# Altium PCB Pocket_Organ_V17_2021-03-17.pcbdoc (part 2 of 2)
Units mil, origin at the board's own origin, x right, y up, seen from the top; angles counter-clockwise.
Board outline 7067.95 x 4900.94 mil, 2 copper layers (Top Layer, Bottom Layer); 193 components, 249 nets, 797 pads, 188 vias.
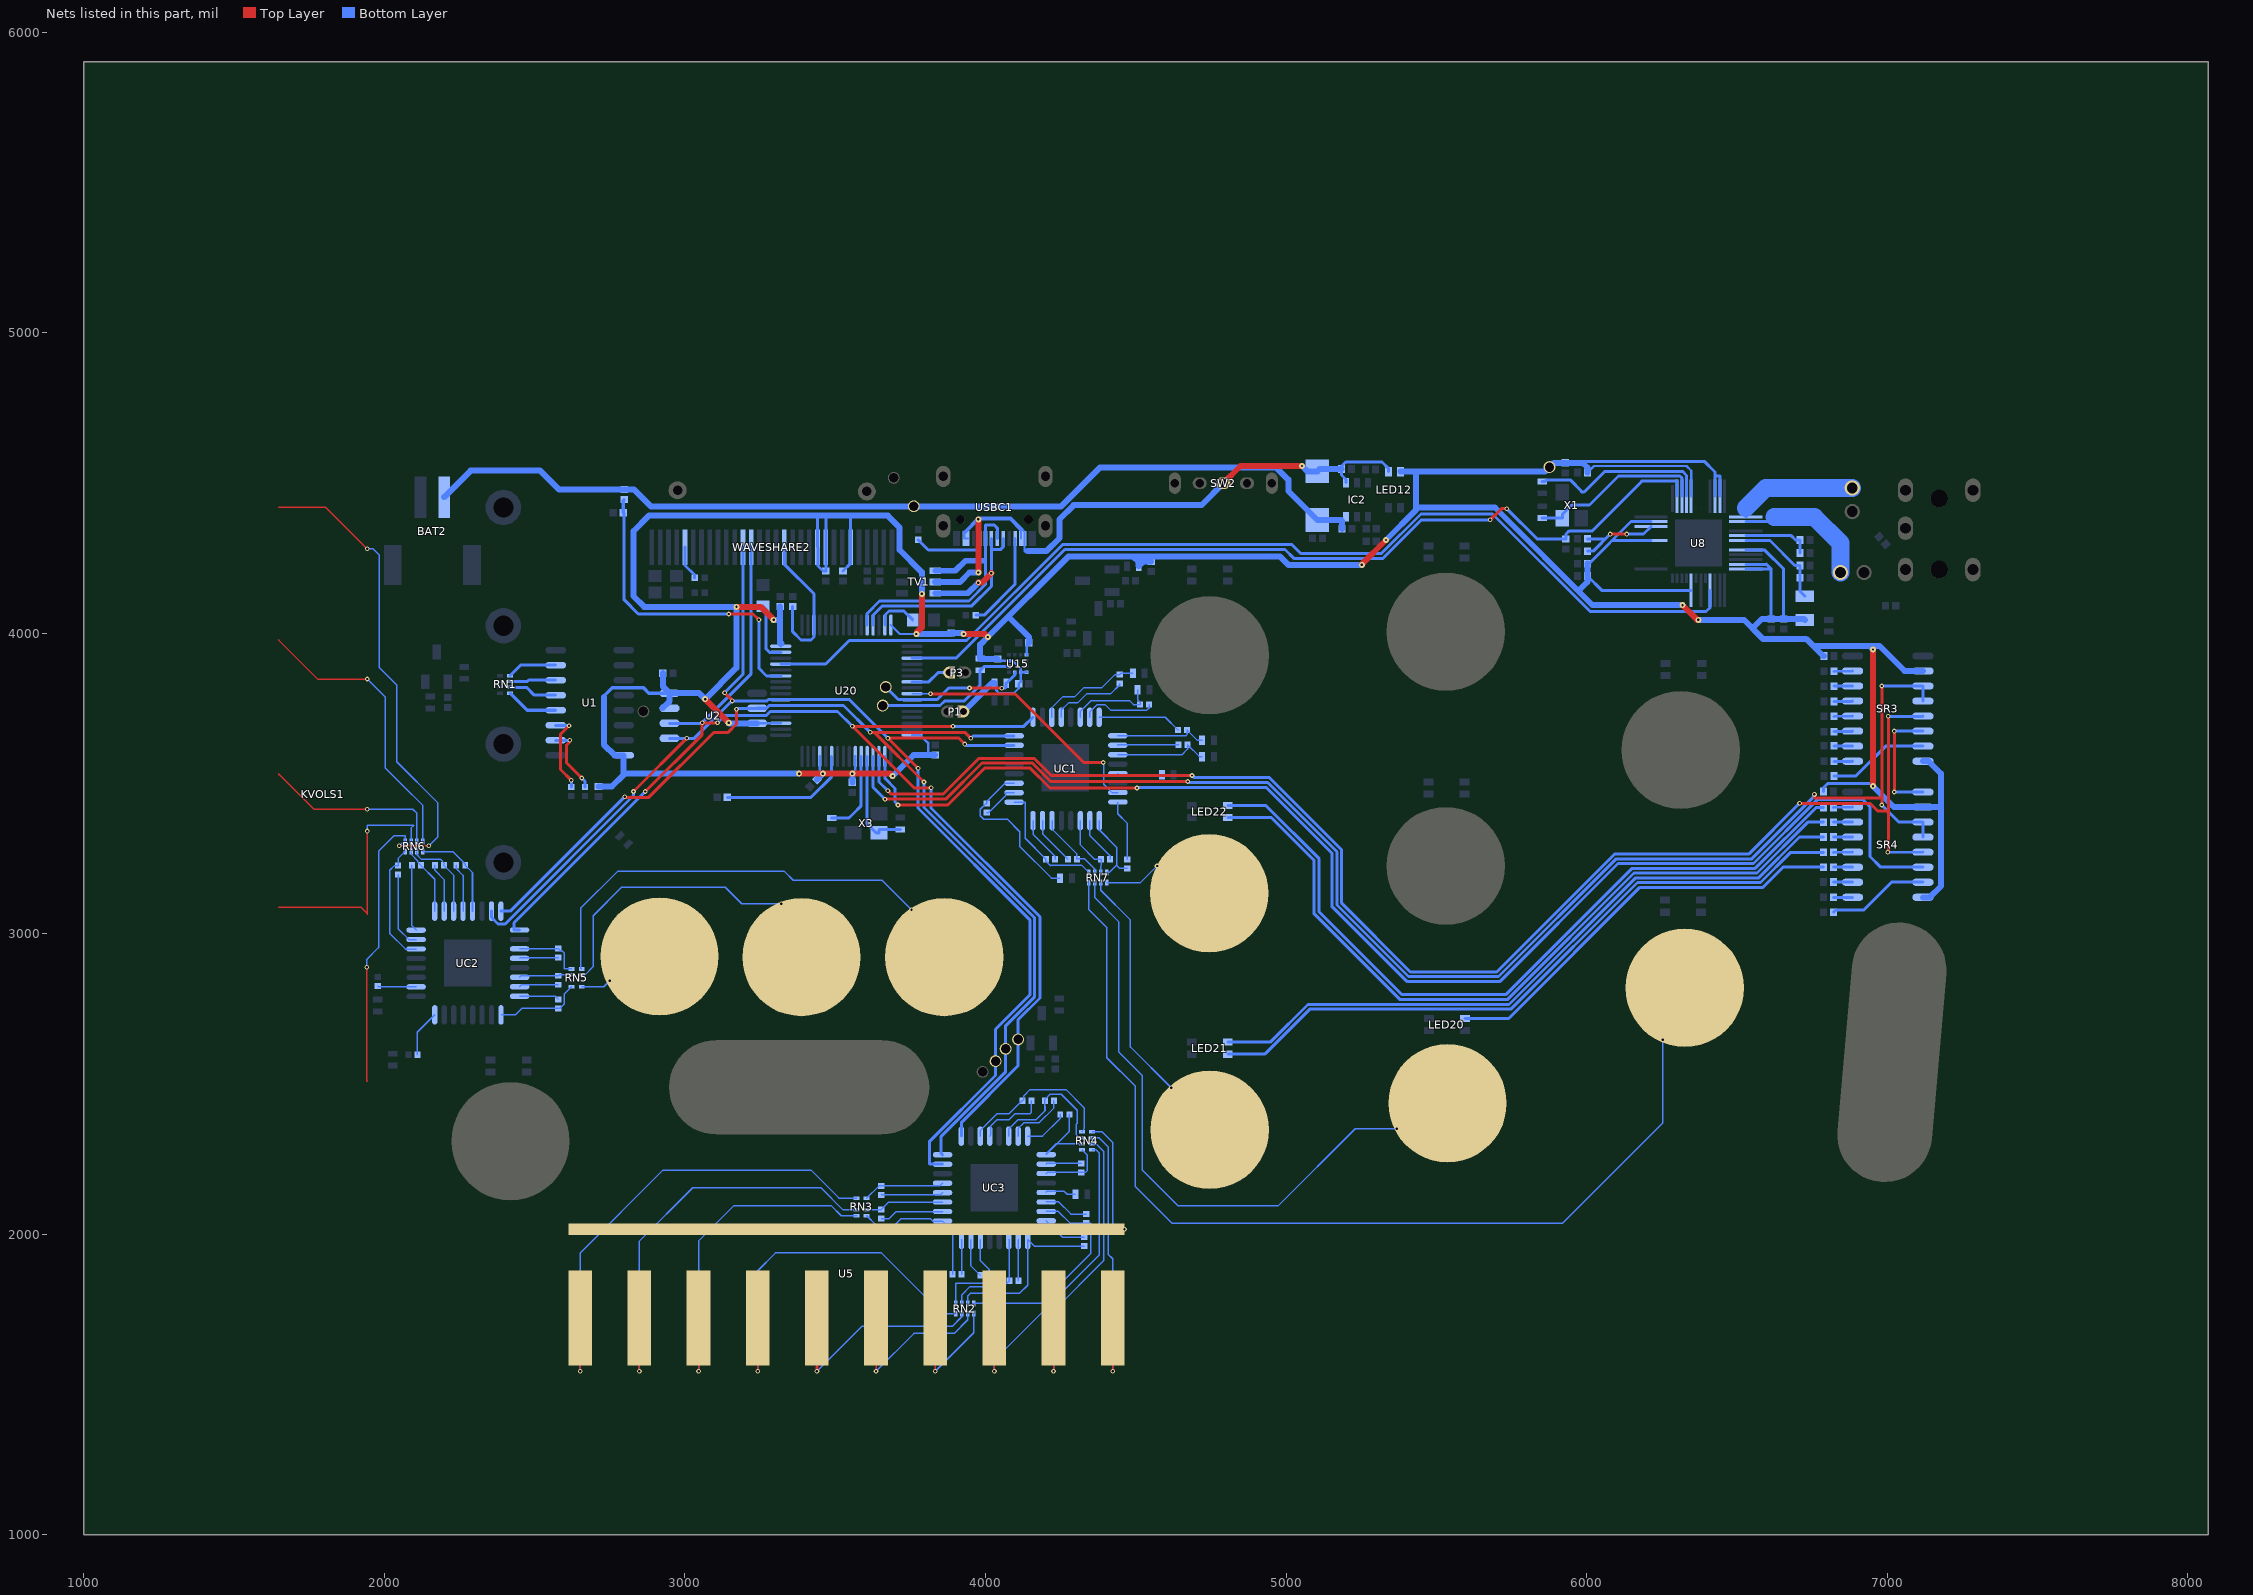
[diagram p2: the nets of this part, all layers, seen from the top]

## Via types
v1: diameter 15.75, hole 7.87, Top Layer to Bottom Layer, 148 vias
v2: diameter 20, hole 7.87, Top Layer to Bottom Layer, 40 vias

## Nets (pads, with @x,y where several pads share a name; then routed paths per layer and width w, separated by ;. In a path a pad name is that pad's centre, name@x,y a point inside that pad or via, vN(x,y) a via of type N, cw(c..) or ccw(c..) an arc to the next point about the centre after c; other vN are vias at no path point) (continued)
R82_1: LED20.2 R82.1 | length 1401.7
  Bottom Layer w10: LED20.2@5595.43,2717.91 5740.52,2717.88 6177.12,3154.58 6586.62,3154.58 6653.52,3221.58 R82.1@6788.42,3221.58
R83_1: LED21.4 R83.1 | length 2260.6
  Bottom Layer w10: LED21.4@4806.02,2599.18 4928.82,2599.18 5078.72,2749.08 5748.02,2749.08 6169.32,3170.38 6578.72,3170.38 6679.12,3270.78 R83.1@6788.41,3270.75
R84_1: LED21.2 R84.1 | length 2265.3
  Bottom Layer w10: LED21.2@4806.02,2639.18 4947.22,2639.18 5072.82,2764.88 5742.12,2764.88 6163.42,3186.08 6572.82,3186.08 6708.62,3321.98 R84.1@6788.42,3321.98
R85_1: LED22.4 R85.1 | length 2581.8
  Bottom Layer w10: LED22.4@4806.02,3386.58 4951.12,3386.58 5092.52,3245.18 5092.52,3067.98 5379.92,2780.58 5736.22,2780.58 6157.52,3201.88 6566.92,3201.88 6736.22,3371.18 R85.1@6788.42,3371.18
R86_1: LED22.2 R86.1 | length 2604.1
  Bottom Layer w10: LED22.2@4806.02,3426.58 4932.72,3426.58 5110.22,3249.08 5110.22,3071.98 5383.82,2798.28 5732.32,2798.28 6151.62,3217.58 6561.02,3217.58 6763.82,3420.38 R86.1@6788.41,3420.36
RN2_1: RN2.1 U5.4 | length 1279.3
  Top Layer w5: v1(3242.13,1544.37) U5.4@3242.12,1721.54
  Bottom Layer w5: v1(3242.13,1544.37) 3242.13,1879.02 3301.18,1938.07 3653.54,1938.07 3855.41,1736.21 RN2.1@3901.57,1736.2
RN2_2: RN2.2 U5.5 | length 745.2
  Top Layer w10: v1(3438.98,1544.37) U5.5@3438.97,1721.54
  Bottom Layer w5: v1(3438.98,1544.37) 3588.62,1693.98 3889.76,1693.98 3921.26,1725.48 RN2.2@3921.25,1736.2
RN2_3: RN2.3 U5.6 | length 573.8
  Top Layer w5: v1(3635.83,1544.37) U5.6@3635.82,1721.54
  Bottom Layer w5: v1(3635.83,1544.37) 3761.82,1670.36 3895.66,1670.36 3940.94,1715.63 RN2.3@3940.94,1736.2
RN2_4: RN2.4 U5.7 | length 422
  Top Layer w5: v1(3832.68,1544.37) U5.7@3832.67,1721.54
  Bottom Layer w5: v1(3832.68,1544.37) 3960.63,1672.33 RN2.4@3960.62,1736.2
RN3_1: RN3.1 U5.1 | length 1643.2
  Top Layer w5: v1(2651.57,1544.37) U5.1@2651.57,1721.54
  Bottom Layer w5: v1(2651.57,1544.37) 2651.62,1938.18 2927.11,2213.68 3419.28,2213.68 3512.45,2120.51 RN3.1@3571.12,2120.51
RN3_3: RN3.3 U5.2 | length 1436.8
  Top Layer w5: v1(2848.42,1544.37) U5.2@2848.42,1721.54
  Bottom Layer w5: v1(2848.42,1544.37) 2848.42,1977.43 3025.59,2154.61 3452.76,2154.61 3526.22,2081.14 RN3.3@3571.12,2081.14
RN3_4: RN3.4 U5.3 | length 1199.1
  Top Layer w5: v1(3045.28,1544.37) U5.3@3045.27,1721.54
  Bottom Layer w5: v1(3045.28,1544.37) 3045.28,1977.44 3163.38,2095.55 3486.22,2095.55 3520.31,2061.46 RN3.4@3571.12,2061.46
RN4_1: RN4.1 U5.8 | length 1075.6
  Top Layer w5: v1(4029.53,1544.37) U5.8@4029.52,1721.54
  Bottom Layer w5: v1(4029.53,1544.37) 4029.52,1581.78 4377.92,1930.18 4377.92,2270.98 4367.52,2281.48 RN4.1@4354.78,2281.45
RN4_2: RN4.2 U5.9 | length 1027
  Top Layer w5: v1(4226.38,1544.37) U5.9@4226.37,1721.54
  Bottom Layer w5: v1(4226.38,1544.37) 4226.42,1745.18 4393.72,1912.48 4393.72,2275.28 4367.82,2301.18 RN4.2@4354.82,2301.18
RN4_3: RN4.3 U5.10 | length 995.6
  Top Layer w5: v1(4423.23,1544.37) U5.10@4423.22,1721.54
  Bottom Layer w5: RN4.3@4354.78,2320.83 4378.11,2320.82 4407.95,2290.98 4407.95,1933.65 4423.22,1918.38 v1(4423.23,1544.37)
RN4_4: RN4.4 U5.11 | length 1336.3
  Top Layer w5: U5.11@3537.4,2016.81 v1(4462.6,2016.81)
  Bottom Layer w5: RN4.4@4354.78,2340.51 4388.42,2340.48 4423.22,2305.68 4423.22,2016.78 v1(4462.6,2016.81)
RN5_5: K3RD.1 RN5.5 | length 300.4
  Top Layer w10: v1(2750,2843.58) 2834.65,2843.58 K3RD.1@2915.35,2924.29
  Bottom Layer w5: RN5.5@2656.59,2823.69 2730.1,2823.69 v1(2750,2843.58)
RN5_7: K5TH.1 RN5.7 | length 1111.7
  Top Layer w10: v1(3320.87,3099.49) 3387.79,3032.56 K5TH.1@3387.79,2922.32
  Bottom Layer w5: RN5.7@2656.62,2863.08 2667.32,2863.08 2694.92,2890.58 2694.92,3060.08 2789.22,3154.38 3134.12,3154.38 3189.02,3099.48 v1@3320.82,3099.48
RN5_8: K7TH.1 RN5.8 | length 1612
  Top Layer w10: v1(3753.94,3079.8) 3862.2,2971.54 K7TH.1@3862.2,2922.32
  Bottom Layer w5: RN5.8@2656.62,2882.78 2653.52,2882.78 2653.52,3085.38 2775.72,3207.58 3330.92,3207.58 3360.32,3178.18 3655.52,3178.18 v1(3753.94,3079.8)
RN6_1: KVOLS1.4 RN6.1 | length 966
  Top Layer w5: KVOLS1.4@1647.64,3977.46 1777.58,3847.52 v1(1942.91,3847.52)
  Bottom Layer w5: v1(1942.91,3847.52) 2001.96,3788.47 2001.96,3552.24 2061.02,3493.19 2127.95,3426.26 RN6.1@2127.95,3307.31
RN6_2: KVOLS1.3 RN6.2 | length 612.6
  Top Layer w5: KVOLS1.3@1647.64,3528.64 1647.63,3532.56 1765.74,3414.45 v1(1942.91,3414.45)
  Bottom Layer w5: v1(1942.91,3414.45) 2094.48,3414.45 2108.27,3400.67 RN6.2@2108.26,3307.31
RN6_3: KVOLS1.2 RN6.3 | length 813.1
  Top Layer w5: KVOLS1.2@1647.64,3087.7 1922.87,3087.7 1942.91,3067.66 ; 1942.92,3064.06 v1(1942.92,3341.61)
  Bottom Layer w5: v1(1942.92,3341.61) 1942.92,3360.98 2097.95,3360.98 2088.58,3351.61 RN6.3@2088.57,3307.31
RN6_4: KVOLS1.1 RN6.4 | length 2497.5
  Top Layer w5: KVOLS1.1@1647.64,4418.41 1805.09,4418.41 v1(1942.91,4280.59) ; v1(1940.95,2888.86) 1940.95,2510.93 KVOLS1.1@1942.92,2508.96 ; v1(2049.21,3292.4) v1(2147.64,3292.4)
  Bottom Layer w5: v1(1940.95,2888.86) 1940.92,2914.48 1980.32,2953.78 1980.32,3274.68 2031.52,3325.88 2068.92,3325.88 RN6.4@2068.89,3307.31 ; v1(1942.91,4280.59) 1962.62,4280.58 1982.32,4260.88 1982.32,3886.88 2041.32,3827.88 2041.32,3571.98 2177.92,3435.28 2177.92,3322.68 v1(2147.64,3292.4) ; v1(2049.21,3292.4) 2064.07,3307.26 RN6.4@2068.89,3307.31
RN7_1: KLA1.1 RN7.1 | length 3499.5
  Top Layer w5: v1(6253.94,2646.73) 6326.72,2719.52 KLA1.1@6326.72,2819.98
  Bottom Layer w5: RN7.1@4344.19,3170.25 4344.17,3080.13 4403.52,3020.78 4403.52,2587.68 4497.91,2493.28 4497.91,2158.68 4620.12,2036.48 5919.32,2036.48 6253.91,2371.18 v1@6253.91,2646.78
RN7_2: KUT1.1 RN7.2 | length 2227.7
  Top Layer w5: v1(5368.11,2351.46) 5452.73,2436.08 KUT1.1@5537.42,2436.08
  Bottom Layer w5: RN7.2@4363.87,3170.25 4363.86,3119.49 4442.91,3040.43 4442.91,2607.36 4521.65,2528.62 4521.65,2213.66 4620.07,2115.24 4639.76,2095.55 4974.4,2095.55 5230.31,2351.46 v1(5368.11,2351.46)
RN7_3: KSI1.1 RN7.3 | length 973
  Top Layer w5: v1(4618.11,2487.29) 4618.11,2475.39 KSI1.1@4746.02,2347.48
  Bottom Layer w5: RN7.3@4383.52,3170.28 4383.52,3144.88 4482.32,3046.08 4482.32,2623.08 v1(4618.11,2487.29)
RN7_4: KFA1.1 RN7.4 | length 401.3
  Top Layer w5: v1(4570.87,3225.47) 4653.52,3225.47 KFA1.1@4744.12,3134.88
  Bottom Layer w5: RN7.4@4403.24,3170.25 4515.62,3170.24 v1(4570.87,3225.47)
RST_MIDI: R13.2 U8.38 U20.51 | length 2960.4
  Top Layer w10: v1(5679.13,4377.05) 5716.53,4414.45 v1(5734.25,4414.45)
  Bottom Layer w10: U20.51@3755.72,3916.86 3902.02,3916.88 4263.82,4278.58 4996.12,4278.58 5025.62,4249.08 5322.82,4249.08 5450.82,4377.08 v1@5679.12,4377.08 ; v1@5734.22,4414.48 5835.62,4313.08 R13.2@5931.12,4313.08 ; R13.2@5931.09,4313.04 5931.1,4329.81 5940.94,4339.64 6017.71,4339.64 6183.02,4504.95 6183.02,4506.98 6301.02,4506.98 U8.38@6301.04,4455.78
RST_OLED: R12.1 U20.35 WAVESHARE2.14 | length 509.8
  Bottom Layer w10: WAVESHARE2.14@3330.71,4286.49 3330.72,4229.38 3428.96,4131.14 U20.35@3428.96,4027.08 ; R12.1@3358.26,4088.69 3358.32,4004.98 3385.82,3977.48 3419.32,3977.48 3429.12,3987.28 U20.35@3428.95,4027.09
S$51: 
S$67: 
S$69: 
S$76: 
S$78: 
S$82: 
S$84: 
S$86: 
S$89: 
S$2850: 
S$2853: 
S$18198: 
S$18200: 
S$18205: 
S$18209: 
S$18211: 
S$133904: 
S$141146: 
S$146126: 
S$148393: 
S$148395: 
S$148397: 
S$148399: 
S$148401: 
S$148403: 
S$148405: 
S$148407: 
S$148409: 
S$148411: 
S$148413: 
S$148415: 
S$148417: 
S$148421: 
S$148423: 
S$148425: 
S$148427: 
S$148429: 
S$148431: 
S$148433: 
S$148435: 
S$148437: 
S$148441: 
S$148445: 
S$148447: 
S$148723: 
S$148969: 
S$148971: 
S$148973: 
SCL: pad.24 R38.1 U15.12 U20.58 | length 497.2
  Top Layer w10: v1(3946.84,3817.78) 4053.17,3817.78 v1(4053.79,3817.16)
  Bottom Layer w10: pad.24@3667.95,3820.98 3709.88,3779.05 U20.58@3755.73,3779.05 ; U20.58@3755.72,3779.05 3839.02,3779.08 3877.72,3817.78 v1(3946.84,3817.78) ; v1(4053.79,3817.16) 4064.74,3817.16 4068.9,3821.32 R38.1@4068.89,3833.53 4070.16,3833.53 4097.66,3861.03 U15.12@4097.65,3869.53
SDA: pad.25 R39.1 U15.2 U20.59 | length 502.6
  Bottom Layer w10: pad.25@3657.95,3759.37 U20.59@3755.72,3759.38 ; U20.59@3755.72,3759.38 3848.82,3759.38 3864.22,3774.68 3929.33,3774.68 3982.28,3827.62 R39.1@3982.28,3876.83 3994.67,3889.23 U15.2@4077.97,3889.22
SPI_MISO: pad.21 U2.2 U20.22 UC1.16 UC2.16 UC3.16 | length 3841.1
  Top Layer w10: v1(2799.22,3455.79) 2801.19,3453.82 2879.92,3453.82 3096.45,3670.35 3143.7,3670.35 3171.26,3697.92 v1(3171.26,3747.13) ; v1(3795.28,3505) 3629.93,3670.35 3616.14,3670.35 3931.1,3670.35 v1(3950.79,3650.67)
  Bottom Layer w10: UC2.16@2387.55,3075.14 2418.56,3075.14 v1(2799.22,3455.79) ; v1(3171.26,3747.13) 3174.39,3750.26 U2.2@3240.15,3750.26 ; U2.2@3240.12,3750.28 3271.02,3750.28 3280.12,3759.38 U20.22@3318.72,3759.38 3527.11,3759.38 v1(3616.14,3670.35) ; v1(3795.28,3505) 3795.32,3420.38 4163.42,3052.28 4163.42,2790.48 4066.92,2693.98 pad.21@4066.92,2616.92 4066.92,2540.48 3852.32,2325.88 3852.32,2269.28 UC3.16@3857.02,2264.61 ; v1(3950.79,3650.67) 3958.41,3658.3 UC1.16@4095.21,3658.31
SPI_MOSI: pad.22 U2.5 U20.23 UC1.15 UC2.15 UC3.15 WAVESHARE2.19 | length 4549.9
  Top Layer w10: v1(2828.74,3473.5) v1(3005.91,3650.67) ; v1(3131.89,3802.24) 3157.48,3776.65 v1(3157.48,3774.68) ; v1(3775.59,3550.28) v1(3675.2,3650.67) 3911.41,3650.67 v1(3931.1,3630.98)
  Bottom Layer w10: UC2.15@2356.12,3075.18 2356.12,3054.48 2377.92,3032.58 2401.62,3032.58 2828.74,3459.7 v1(2828.74,3473.5) ; U2.5@2948.81,3650.26 3031.1,3650.26 3155.52,3774.68 3272.33,3774.68 3277.33,3779.08 U20.23@3318.72,3779.05 ; v1(3131.89,3802.24) 3192.91,3863.27 WAVESHARE2.19@3192.91,4286.49 ; U20.23@3318.72,3779.05 3546.82,3779.05 v1(3675.2,3650.67) ; v1(3775.59,3550.28) 3775.62,3418.38 4147.62,3046.38 4147.62,2796.38 4033.42,2682.18 pad.22@4033.42,2576.2 4033.42,2528.58 3813.02,2308.18 3813.02,2233.08 UC3.15@3857.02,2233.11 ; v1(3931.1,3630.98) 3935.28,3626.8 UC1.15@4095.21,3626.81
SPI_SCLK: pad.20 U2.6 U20.21 UC1.17 UC2.17 UC3.17 WAVESHARE2.18 | length 4641.2
  Top Layer w10: v1(2868.11,3473.5) 3057.09,3662.49 v1(3057.09,3701.85) v1(3108.27,3701.85) ; v1(3818.9,3485.32) 3761.8,3485.32 v1(3557.09,3690.04) v1(3891.73,3690.04)
  Bottom Layer w10: UC2.17@2449.52,3012.58 2431.12,3012.58 2431.12,3036.48 v1(2868.11,3473.5) ; U2.6@2948.81,3700.26 3055.49,3700.26 v1(3057.09,3701.85) 3220.52,3865.28 WAVESHARE2.18@3220.47,4286.49 ; v1@3108.32,3701.88 3131.92,3725.48 3269.92,3725.48 3284.12,3739.68 U20.21@3318.72,3739.68 3507.44,3739.68 v1(3557.09,3690.04) ; v1(3818.9,3485.32) 3818.9,3418.49 4181.12,3056.26 4181.12,2786.48 4108.22,2713.68 pad.20@4108.22,2648.35 4108.22,2560.38 3919.61,2371.18 UC3.17@3919.62,2326.61 ; v1(3891.73,3690.04) 4127.56,3690.04 UC1.17@4157.81,3720.31
SR3_1: R65.2 SR3.1 | length 61.3
  Bottom Layer w10: R65.2@6823.78,3573.9 6884.77,3573.9 SR3.1@6884.96,3574.09
SR3_2: R66.2 SR3.2 | length 61.1
  Bottom Layer w10: R66.2@6823.78,3625.08 SR3.2@6884.92,3624.08
SR3_3: R69.2 SR3.3 | length 61.9
  Bottom Layer w10: R69.2@6823.78,3672.32 6883.19,3672.33 SR3.3@6884.96,3674.09
SR3_4: R72.2 SR3.4 | length 61.1
  Bottom Layer w10: R72.2@6823.78,3723.5 SR3.4@6884.92,3724.08
SR3_5: R73.2 SR3.5 | length 61.8
  Bottom Layer w10: R73.2@6823.78,3772.72 6883.57,3772.71 SR3.5@6884.96,3774.09
SR3_6: R76.2 SR3.6 | length 61.3
  Bottom Layer w10: R76.2@6823.78,3823.9 6884.76,3823.89 SR3.6@6884.96,3824.09
SR3_7: R78.2 SR3.7 | length 61.1
  Bottom Layer w10: R78.2@6823.78,3873.11 SR3.7@6884.92,3874.08
SR3_14: SR3.14 SR4.9 | length 393.6
  Top Layer w10: v1(7023.62,3471.54) v1(7023.62,3674.29)
  Bottom Layer w10: v1(7023.62,3471.54) 7118.77,3471.54 SR4.9@7118.96,3471.34 ; v1(7023.62,3674.29) 7118.77,3674.29 SR3.14@7118.96,3674.09
SR3_15: R64.2 SR3.15 | length 336.4
  Bottom Layer w10: R64.2@6823.78,3524.68 6895.66,3524.68 6995.07,3624.09 SR3.15@7118.96,3624.09
SR4_1: R80.2 SR4.1 | length 63.2
  Bottom Layer w10: R80.2@6821.81,3121.14 SR4.1@6884.96,3121.34
SR4_2: R81.2 SR4.2 | length 63.2
  Bottom Layer w10: R81.2@6821.81,3172.32 SR4.2@6884.96,3171.34
SR4_3: R82.2 SR4.3 | length 63.2
  Bottom Layer w10: R82.2@6821.81,3221.54 SR4.3@6884.96,3221.34
SR4_4: R83.2 SR4.4 | length 63.2
  Bottom Layer w10: R83.2@6821.8,3270.75 SR4.4@6884.96,3271.34
SR4_5: R84.2 SR4.5 | length 63.2
  Bottom Layer w10: R84.2@6821.81,3321.93 SR4.5@6884.96,3321.34
SR4_6: R85.2 SR4.6 | length 63.2
  Bottom Layer w10: R85.2@6821.8,3371.15 6822,3371.34 SR4.6@6884.96,3371.34
SR4_7: R86.2 SR4.7 | length 63.2
  Bottom Layer w10: R86.2@6821.81,3420.36 SR4.7@6884.96,3421.34
SR4_15: R79.2 SR4.15 | length 338.3
  Bottom Layer w10: R79.2@6821.81,3071.93 6829.67,3079.8 6923.22,3079.8 7014.77,3171.34 SR4.15@7118.96,3171.34
SR-CLK: SR3.11 SR3.12 SR4.11 SR4.12 U20.4 | length 5006.5
  Top Layer w10: v1@3665.32,3447.88 3868.11,3447.88 3988.22,3567.98 4155.52,3567.98 4216.74,3506.76 v1(4673.22,3506.76) ; v1@6757.82,3463.68 6757.82,3451.88 6982.27,3451.85 v1(6982.28,3428.23) ; v1(6982.28,3428.23) v1(6982.28,3824.1)
  Bottom Layer w10: U20.4@3625.8,3590.09 3625.8,3487.46 v1(3665.36,3447.91) ; v1(4673.22,3506.76) 4676.94,3503.03 4708.66,3503.03 4938.97,3503.03 5169.29,3272.72 5169.29,3095.55 5407.48,2857.36 5706.68,2857.36 6098.42,3249.09 6549.51,3249.09 6757.87,3457.45 v1(6757.87,3463.66) ; v1(6982.28,3428.23) 7039.16,3371.34 SR4.11@7118.96,3371.34 SR4.12@7118.96,3321.34 ; v1(6982.28,3824.1) SR3.11@7118.96,3824.09 SR3.12@7118.96,3774.09
SR-DATA: SR4.14 U20.2 | length 4481.7
  Top Layer w10: v1(3708.66,3428.23) 3874.01,3428.23 3998.03,3552.24 4147.63,3552.24 4214.77,3485.11 v1(4503.93,3485.11)
  Bottom Layer w10: U20.2@3665.17,3590.09 3665.22,3516.98 3698.82,3483.38 3698.82,3438.08 v1@3708.62,3428.18 ; v1(4503.93,3485.11) 4506.1,3487.28 4933.02,3487.28 5153.52,3266.78 5153.52,3089.68 5401.62,2841.58 5712.62,2841.58 6104.32,3233.38 6555.12,3233.38 6767.71,3445.98 6919.32,3445.98 6942.91,3422.28 6942.91,3256.98 6978.52,3221.38 SR4.14@7118.91,3221.38
SR-OE: SR3.13 SR4.13 U20.3 | length 4899.6
  Top Layer w10: v1(3675.2,3475.47) 3685.02,3465.68 3860.32,3465.68 3978.42,3583.78 4161.42,3583.78 4218.72,3526.48 v1@4687.02,3526.48 ; v1(6708.66,3434.13) 6942.91,3434.13 6968.49,3408.54 6998.02,3408.54 7003.93,3402.64 7003.93,3341.29 ; v1(7001.96,3270.75) 7003.93,3272.72 v1(7003.93,3723.5)
  Bottom Layer w10: U20.3@3645.49,3590.09 3645.5,3505.17 v1(3675.2,3475.47) ; v1@4687.02,3526.48 4692.92,3520.58 4943.42,3520.58 5185.02,3278.98 5185.02,3101.48 5413.42,2872.98 5700.82,2872.98 6092.52,3264.88 6539.42,3264.88 v1@6708.62,3433.98 ; v1@7001.92,3270.78 SR4.13@7118.92,3271.38 ; v1(7003.93,3723.5) 7118.37,3723.5 SR3.13@7118.96,3724.09
  other v1: 4687,3526.45
TOUCH_TRIGGER: U20.57 UC1.31 | length 863.4
  Top Layer w10: v1(3816.93,3798.31) 4098.42,3798.28 4326.82,3569.98 v1(4391.73,3569.96)
  Bottom Layer w5: U20.57@3755.72,3798.74 3756.16,3798.31 v1(3816.93,3798.31) ; v1(4391.73,3569.96) 4393.7,3569.96 4393.7,3497.12 4421.02,3469.8 UC1.31@4440.21,3469.81
TX_MIDI: U8.16 U20.29 | length 3520.9
  Bottom Layer w10: U20.29@3318.72,3897.16 3468.32,3897.18 3547.02,3975.48 3937.02,3975.48 4255.92,4294.38 5019.72,4294.38 5049.22,4264.88 5316.92,4264.88 5448.82,4396.68 5687.02,4396.68 6011.82,4071.98 6397.62,4071.98 6411.02,4085.38 U8.16@6411.04,4142.79
U1_2: C84.2 U1.2 | length 231
  Top Layer w10: v1(2616.22,3643.62) 2616.22,3638.1 2606.22,3628.1 2606.22,3568.1 v1(2656.22,3518.1)
  Bottom Layer w10: U1.2@2570.01,3643.62 v1(2616.22,3643.62) ; v1(2656.22,3518.1) 2667.31,3507 C84.2@2667.32,3488.29
U1_3: C86.2 U1.3 | length 274.8
  Top Layer w10: v1@2614.12,3691.78 2586.22,3663.88 2586.22,3546.58 v1(2622.04,3510.7)
  Bottom Layer w10: U1.3@2570.01,3693.62 2612.35,3693.62 v1(2614.17,3691.8) ; C86.2@2622.04,3488.29 v1(2622.04,3510.7)
U1_4: RN1.5 U1.4 | length 175
  Bottom Layer w10: RN1.5@2418.4,3800.07 2474.86,3743.62 U1.4@2570.01,3743.62
U1_5: RN1.6 U1.5 | length 162.4
  Bottom Layer w10: RN1.6@2418.41,3819.75 2472.44,3819.75 2498.57,3793.62 U1.5@2570.01,3793.62
U1_6: RN1.7 U1.6 | length 153.3
  Bottom Layer w10: RN1.7@2418.4,3839.44 2476.38,3839.44 2480.55,3843.62 U1.6@2570.01,3843.62
U1_7: RN1.8 U1.7 | length 165.9
  Bottom Layer w10: RN1.8@2418.4,3859.12 2452.9,3893.62 U1.7@2570.01,3893.62
U8_1: C42.1 U8.1 | length 432.8
  Bottom Layer w10: U8.1@6529.52,4387.27 6529.52,4438.07
  Bottom Layer w59.05: 6529.52,4416.4 6596.46,4483.34 C42.1@6883.85,4483.34
U8_2: C41.1 U8.2 | length 449.3
  Bottom Layer w10: U8.2@6529.52,4371.27 6624.02,4371.28
  Bottom Layer w59.05: 6624.01,4386.89 6757.87,4386.89 6844.48,4300.28 C41.1@6844.48,4201.85
U8_5: C44.1 C45.1 U8.5 | length 229.3
  Bottom Layer w10: U8.5@6529.52,4324.27 6680.71,4324.28 6694.87,4310.11 C44.1@6709.68,4310.12 C45.1@6709.67,4266.81
U8_6: C58.1 C59.1 L1.2 U8.6 | length 323.8
  Bottom Layer w10: U8.6@6529.52,4308.27 6610.12,4308.28 6692.91,4225.48 C59.1@6709.67,4225.47 ; C59.1@6709.67,4225.47 C58.1@6709.67,4184.13 6709.67,4139.82 L1.2@6726.37,4123.11
U8_34: C48.1 C49.1 U8.34 | length 328.3
  Top Layer w10: v1(6078.74,4329.8) v1(6133.85,4329.8)
  Bottom Layer w10: C48.1@6002.91,4272.72 6021.65,4272.71 v1(6078.74,4329.8) 6062.99,4314.05 C49.1@6002.91,4314.05 ; v1(6133.85,4329.8) 6189.19,4329.8 U8.34@6214.68,4355.27
U8_39: C12.2 U8.39 X1.3 | length 592.8
  Bottom Layer w10: C12.2@5852.37,4382.95 X1.3@5919.29,4382.95 5919.29,4394.76 5950.79,4426.26 6009.84,4426.26 6106.29,4522.71 6311.02,4522.71 6316.92,4516.81 U8.39@6317.04,4455.78
U8_40: C11.2 U8.40 X1.1 | length 603.7
  Bottom Layer w10: C11.2@5852.36,4505 5862.21,4505.01 5866.14,4508.94 5946.85,4508.94 5982.28,4473.5 X1.1@5982.29,4469.57 5992.13,4469.57 6061.02,4538.47 6318.93,4538.47 6332.7,4524.69 U8.40@6333.04,4455.78
U20_5: C80.1 U20.5 X3.3 | length 358.1
  Bottom Layer w10: U20.5@3606.12,3590.09 3606.13,3365.4 3635.83,3335.7 X3.3@3645.66,3335.71 ; X3.3@3645.66,3335.71 3645.69,3345.56 3647.59,3347.56 C80.1@3716.49,3347.56
U20_6: C81.2 U20.6 X3.1 | length 279.3
  Bottom Layer w10: C81.2@3488.18,3384.92 3545.26,3384.93 X3.1@3559.05,3398.71 3586.44,3426.11 U20.6@3586.43,3590.09
U20_11: R1.1 U20.11 | length 443.3
  Bottom Layer w10: R1.1@3140.71,3453.82 3419.29,3453.82 3488.02,3522.55 U20.11@3488.01,3590.09
U20_31: C2.1 U20.31 | length 199.7
  Bottom Layer w10: C2.1@3259.82,4089.68 3269.72,4079.78 3269.72,3947.88 3281.02,3936.48 U20.31@3318.72,3936.53
U20_47: C79.2 U20.47 | length 143.8
  Bottom Layer w10: U20.47@3665.17,4027.09 3665.22,4060.58 3678.52,4073.88 3728.32,4073.88 C79.2@3757.82,4044.38
UC1_1: C4.2 RN7.5 UC1.1 | length 255.4
  Bottom Layer w5: UC1.1@4378.61,3376.31 4378.62,3345.7 4436.22,3288.1 4436.22,3228.1 ; RN7.5@4403.24,3203.91 4412.02,3203.9 4436.22,3228.1 ; C4.2@4472.12,3217.35 4446.96,3217.35 4436.22,3228.1
UC1_2: C5.1 UC1.2 | length 156
  Bottom Layer w5: UC1.2@4347.11,3376.31 4347.12,3326.98 4414.32,3259.78 C5.1@4414.29,3248.1
UC1_3: C5.2 RN7.6 UC1.3 | length 213.3
  Bottom Layer w5: UC1.3@4315.61,3376.31 4315.62,3295.48 4363.02,3248.08 C5.2@4384.29,3248.1 RN7.6@4383.49,3203.92
UC1_6: C6.2 RN7.7 UC1.6 | length 250
  Bottom Layer w5: UC1.6@4221.21,3376.31 4221.22,3348.48 4304.02,3265.68 C6.2@4304.05,3248.1 ; C6.2@4304.05,3249.6 4304.05,3248.1 4306.02,3250.07 4328.42,3250.07 4363.86,3214.63 RN7.7@4363.87,3203.91
UC1_7: C6.1 UC1.7 | length 163.1
  Bottom Layer w5: UC1.7@4189.71,3376.31 4189.72,3332.43 C6.1@4274.05,3248.1
UC1_8: C8.1 UC1.8 | length 158.4
  Bottom Layer w5: UC1.8@4158.21,3376.31 4158.22,3330.78 4231.22,3257.78 C8.1@4231.22,3248.1
UC1_9: C8.2 RN7.8 UC1.9 | length 422
  Bottom Layer w5: UC1.9@4095.21,3437.91 4131.92,3437.88 4131.92,3317.48 C8.2@4201.22,3248.1 4201.21,3241.45 4216.22,3226.45 4218.18,3228.41 4319.66,3228.41 RN7.8@4344.19,3203.91
UC1_10: C9.1 UC1.10 | length 124.5
  Bottom Layer w5: C9.1@4003.93,3403.18 4010.62,3403.18 4067.02,3459.58 4067.02,3469.38 UC1.10@4095.21,3469.41
UC1_11: C9.2 R17.2 UC1.11 | length 554.4
  Bottom Layer w5: C9.2@4003.93,3433.18 4001.32,3433.18 3982.32,3414.18 3982.32,3392.58 3994.12,3380.78 4072.82,3380.78 4114.12,3339.48 4114.12,3290.48 4219.52,3185.08 R17.2@4247.72,3185.11 ; C9.2@4003.93,3433.18 4003.93,3439.83 4065,3500.9 UC1.11@4095.21,3500.91
UC1_19: C18.1 R19.2 UC1.19 | length 349.1
  Bottom Layer w5: UC1.19@4220.81,3720.31 4220.82,3752.7 4256.22,3788.1 4296.22,3788.1 4326.22,3818.1 4386.22,3818.1 4430.43,3862.31 C18.1@4446.84,3862.31 4451.52,3866.99 R19.2@4490.15,3866.99
UC1_20: C18.2 UC1.20 | length 286.2
  Bottom Layer w5: UC1.20@4252.32,3749.45 UC1.20@4252.31,3720.31 4252.32,3744.2 4276.22,3768.1 4306.22,3768.1 4336.22,3798.1 4416.22,3798.1 4446.84,3828.72 C18.2@4446.84,3832.31
UC1_22: C15.1 R20.2 UC1.22 | length 290.5
  Bottom Layer w5: UC1.22@4315.21,3720.31 4315.22,3739.31 4350.39,3774.48 4480.31,3774.48 4492.12,3762.66 C15.1@4514.52,3762.66 ; R20.2@4505.9,3811.88 4505.92,3778.38 4514.52,3769.78 C15.1@4514.52,3762.66
UC1_23: C15.2 UC1.23 | length 247.9
  Bottom Layer w5: UC1.23@4346.71,3720.31 4346.72,3737.38 4372.02,3762.68 4397.62,3762.68 4417.32,3742.98 4535.42,3742.98 4544.52,3752.08 C15.2@4544.52,3762.66
UC1_24: C14.2 UC1.24 | length 279.8
  Bottom Layer w5: UC1.24@4378.21,3720.31 4598.22,3720.3 C14.2@4640.5,3678.02
UC1_25: C14.1 R21.2 UC1.25 | length 310.9
  Bottom Layer w5: UC1.25@4440.21,3658.71 4666.22,3658.7 4670.5,3662.98 C14.1@4670.5,3678.02 4703.96,3644.56 R21.2@4720.47,3644.55
UC1_26: C13.2 UC1.26 | length 202.9
  Bottom Layer w5: UC1.26@4440.21,3627.21 4441.85,3628.81 C13.2@4642.47,3628.81
UC1_27: C13.1 R22.2 UC1.27 | length 318.7
  Bottom Layer w5: UC1.27@4440.21,3595.71 4653.82,3595.7 4672.47,3614.35 C13.1@4672.47,3628.81 ; C13.1@4672.47,3628.81 4711.85,3589.43 R22.2@4720.47,3589.44
UC1_29: R8.1 UC1.29 | length 148.2
  Bottom Layer w5: UC1.29@4440.21,3532.81 4444.58,3528.41 R8.1@4586.6,3528.41
UC1_32: C4.1 UC1.32 | length 204.1
  Bottom Layer w5: UC1.32@4440.21,3438.31 4440.22,3399.18 4472.12,3367.28 C4.1@4472.12,3247.35
UC2_2: C27.1 UC2.2 | length 128.8
  Bottom Layer w5: C27.1@1977.95,2825.99 1980.69,2823.24 UC2.2@2105.55,2823.24
UC2_6: C26.2 RN6.5 UC2.6 | length 409.6
  Bottom Layer w5: RN6.5@2068.89,3273.65 2045.27,3249.98 C26.2@2045.27,3226.69 2033.66,3226.69 2017.95,3210.98 2017.95,3000.98 2069.79,2949.14 UC2.6@2105.55,2949.14
UC2_7: C26.1 UC2.7 | length 255.1
  Bottom Layer w5: C26.1@2045.27,3196.7 2045.32,3016.78 2081.42,2980.68 UC2.7@2105.52,2980.68
UC2_8: C25.1 UC2.8 | length 221.2
  Bottom Layer w5: C25.1@2091.29,3227.46 2091.3,3026.4 UC2.8@2105.55,3012.14
UC2_9: C25.2 RN6.6 UC2.9 | length 230.9
  Bottom Layer w5: RN6.6@2088.57,3273.65 2088.59,3264.86 2110.19,3243.16 2110.19,3238.56 C25.2@2121.29,3227.46 2167.16,3181.59 UC2.9@2167.15,3075.14
UC2_10: C24.1 UC2.10 | length 165
  Bottom Layer w5: C24.1@2168.02,3227.48 2168.02,3210.98 2198.62,3180.38 UC2.10@2198.62,3075.18
UC2_11: C24.2 RN6.7 UC2.11 | length 285.9
  Bottom Layer w5: RN6.7@2108.26,3273.65 2108.32,3262.68 2123.82,3247.18 2187.22,3247.18 2198.32,3235.18 C24.2@2198.02,3227.48 ; C24.2@2198.07,3227.44 2230.16,3195.34 UC2.11@2230.15,3075.14
UC2_12: C23.1 UC2.12 | length 161.7
  Bottom Layer w5: C23.1@2238.93,3227.46 2238.92,3216.68 2261.62,3193.88 UC2.12@2261.62,3075.18
UC2_13: C23.2 RN6.8 UC2.13 | length 325.1
  Bottom Layer w5: RN6.8@2127.96,3273.59 2227.47,3273.59 2268.93,3232.13 C23.2@2268.93,3227.46 2293.06,3203.32 UC2.13@2293.05,3075.14
UC2_19: C19.1 RN5.1 UC2.19 | length 233.3
  Bottom Layer w5: UC2.19@2449.52,2949.58 2450.83,2950.89 C19.1@2578.74,2950.89 ; C19.1@2578.78,2950.93 2585.88,2943.72 2590.58,2943.72 2598.38,2935.93 2598.38,2882.72 RN5.1@2622.89,2882.71
UC2_20: C19.2 UC2.20 | length 130.4
  Bottom Layer w5: UC2.20@2449.55,2918.04 2452.41,2920.89 C19.2@2578.74,2920.89
UC2_22: C20.1 RN5.2 UC2.22 | length 176.7
  Bottom Layer w5: UC2.22@2449.55,2855.14 2454.75,2860.33 C20.1@2578.74,2860.33 ; C20.1@2578.74,2860.33 2581.47,2863.06 RN5.2@2622.92,2863.06
UC2_23: C20.2 UC2.23 | length 131.9
  Bottom Layer w5: UC2.23@2449.55,2823.64 2456.25,2830.33 C20.2@2578.74,2830.33
UC2_24: C21.2 UC2.24 | length 133.5
  Bottom Layer w5: UC2.24@2449.55,2792.14 2568.19,2792.14 C21.2@2578.74,2781.59
UC2_25: C21.1 RN5.4 UC2.25 | length 292.8
  Bottom Layer w5: UC2.25@2387.92,2730.18 2435.72,2730.18 2457.13,2751.59 C21.1@2578.74,2751.59 2583.42,2751.58 2598.42,2766.59 2598.42,2799.19 RN5.4@2622.89,2823.65
UC2_32: C28.1 UC2.32 | length 156.7
  Bottom Layer w5: C28.1@2109.49,2597.52 2109.49,2672.06 UC2.32@2167.55,2730.14
UC3_1: C78.2 RN2.6 UC3.1 | length 588.5
  Bottom Layer w5: RN2.6@3940.94,1769.87 3940.92,1794.38 3950.82,1804.18 4114.22,1804.18 4140.42,1830.48 UC3.1@4140.42,1982.61 4162.55,1960.48 C78.2@4328.73,1960.48
UC3_2: C66.1 UC3.2 | length 137.3
  Bottom Layer w5: UC3.2@4108.92,1982.61 4109.49,1982.05 C66.1@4109.49,1845.55
UC3_3: C66.2 RN2.7 UC3.3 | length 344.1
  Bottom Layer w5: RN2.7@3921.25,1769.87 3921.25,1798.31 3948.81,1825.87 4059.81,1825.87 4079.49,1845.55 4079.49,1980.55 UC3.3@4077.42,1982.61
UC3_6: C70.2 RN2.8 UC3.6 | length 329
  Bottom Layer w5: RN2.8@3901.57,1769.87 3901.57,1837.68 3999.99,1837.68 4013.03,1850.71 C70.2@4013.03,1863.27 ; UC3.6@3983.02,1982.61 3983.02,1911.78 4013.02,1881.78 C70.2@4013.03,1863.27
UC3_7: C70.1 UC3.7 | length 132.4
  Bottom Layer w5: UC3.7@3951.52,1982.61 3951.52,1894.78 C70.1@3983.03,1863.27
UC3_8: C71.2 UC3.8 | length 115.6
  Bottom Layer w5: UC3.8@3920.02,1982.61 3920.51,1982.12 C71.2@3920.51,1867.21
UC3_9: C71.1 RN3.5 UC3.9 | length 466.8
  Bottom Layer w5: RN3.5@3604.78,2061.46 3635.26,2030.98 3697.95,2030.98 3717.95,2050.98 3817.95,2050.98 3824.72,2044.21 UC3.9@3857.02,2044.21 ; UC3.9@3857.02,2044.21 3890.51,2010.72 C71.1@3890.51,1867.21
UC3_10: C72.2 UC3.10 | length 239.4
  Bottom Layer w5: C72.2@3652.9,2052.36 3654.27,2050.98 3677.95,2050.98 3702.67,2075.71 UC3.10@3857.02,2075.71 ; UC3.10@3832.51,2075.71 UC3.10@3857.02,2075.71
UC3_11: C72.1 RN3.6 UC3.11 | length 263
  Bottom Layer w5: RN3.6@3604.78,2081.14 3651.69,2081.14 C72.1@3652.9,2082.36 3677.75,2107.21 UC3.11@3857.02,2107.21
UC3_12: C73.2 UC3.12 | length 207.3
  Bottom Layer w5: C73.2@3652.9,2131.1 3849.41,2131.1 UC3.12@3857.02,2138.71
UC3_13: C73.1 RN3.8 UC3.13 | length 272.8
  Bottom Layer w5: RN3.8@3604.78,2120.51 3645.36,2161.1 C73.1@3652.9,2161.09 3848.01,2161.1 UC3.13@3857.02,2170.11
UC3_19: C76.1 RN4.5 UC3.19 | length 536
  Bottom Layer w5: UC3.19@3982.62,2326.61 3982.62,2345.68 4037.62,2400.68 4077.62,2400.68 4120.92,2443.98 C76.1@4122.79,2443.98 4127.92,2449.18 4127.92,2460.98 4148.32,2481.38 4267.72,2481.38 4327.92,2421.18 4327.92,2350.68 4321.12,2343.88 RN4.5@4321.12,2340.51
UC3_20: C76.2 UC3.20 | length 227.5
  Bottom Layer w5: UC3.20@4014.12,2326.61 4017.95,2330.43 4017.95,2360.98 4037.95,2380.98 4077.95,2380.98 4097.95,2400.98 4147.95,2400.98 4152.79,2405.83 C76.2@4152.79,2443.98
UC3_22: C75.1 RN4.6 UC3.22 | length 450.7
  Bottom Layer w5: UC3.22@4077.02,2326.61 4077.02,2350.08 4107.92,2380.98 4167.92,2380.98 4197.92,2410.98 C75.1@4197.6,2443.98 4197.59,2448.66 4214.56,2465.63 4251.96,2465.63 4305.11,2412.48 4305.11,2369.18 4301.18,2365.24 4301.18,2331.77 4312.13,2320.82 RN4.6@4321.12,2320.83
UC3_23: C75.2 UC3.23 | length 196
  Bottom Layer w5: UC3.23@4108.52,2326.61 4108.53,2351.56 4127.95,2370.98 4177.95,2370.98 4227.59,2420.63 C75.2@4227.59,2443.98
UC3_24: C65.2 UC3.24 | length 146.3
  Bottom Layer w5: UC3.24@4140.02,2326.61 4189.72,2326.58 4248.82,2385.68 C65.2@4248.78,2398.7
UC3_25: C65.1 RN4.7 UC3.25 | length 301.3
  Bottom Layer w5: C65.1@4278.77,2398.7 4278.78,2341.76 UC3.25@4202.02,2265.01 4202.02,2268.05 4235.11,2301.14 RN4.7@4321.12,2301.14
UC3_26: C74.1 UC3.26 | length 116.9
  Bottom Layer w5: UC3.26@4202.02,2233.51 4204.49,2235.98 C74.1@4317.95,2235.98
UC3_27: C74.2 RN4.8 UC3.27 | length 217.1
  Bottom Layer w5: UC3.27@4202.02,2202.01 4205.99,2205.98 C74.2@4317.95,2205.99 ; C74.2@4317.95,2205.99 4332.92,2205.98 4337.92,2210.98 4337.92,2264.58 RN4.8@4321.12,2281.45
UC3_29: R18.1 UC3.29 | length 105
  Bottom Layer w5: UC3.29@4202.02,2139.11 4202.02,2142.78 4261.82,2142.78 4271.62,2132.98 R18.1@4299.2,2132.95
UC3_30: C77.1 UC3.30 | length 149.3
  Bottom Layer w5: UC3.30@4202.02,2107.61 4243.82,2107.58 4284.22,2067.28 C77.1@4334.62,2067.28
UC3_31: C77.2 RN2.5 UC3.31 | length 724.2
  Bottom Layer w5: RN2.5@3960.62,1769.87 4184.15,1769.87 4350.39,1936.11 4350.39,2037.25 C77.2@4334.64,2037.25 ; UC3.31@4202.02,2076.11 4241.92,2076.08 4280.72,2037.28 C77.2@4334.62,2037.28
UC3_32: C78.1 UC3.32 | length 149.1
  Bottom Layer w5: UC3.32@4202.02,2044.61 4256.15,1990.48 C78.1@4328.73,1990.47
USB-DM: TV1.4 U20.44 USBC1.A7 USBC1.B7 | length 922.6
  Bottom Layer w10: U20.44@3606.12,4027.09 3606.12,4065.88 3647.62,4107.38 3944.92,4107.38 4000.02,4162.48 USBC1.B7@3999.99,4315.11 4000,4359.33 4029.52,4359.33 4039.37,4349.49 USBC1.A7@4039.36,4315.11
  Bottom Layer w19.68: TV1.4@3832.67,4207.76 3899.62,4207.78 3933.12,4241.18 3994.12,4241.18
USB-DP: TV1.6 U20.45 USBC1.A6 USBC1.B6 | length 910.8
  Top Layer w19.68: v1(3976.38,4168.38) 3988.22,4168.38 v1(4019.69,4199.88)
  Bottom Layer w10: U20.45@3625.8,4027.09 3625.82,4059.98 3655.52,4089.68 3952.82,4089.68 4019.72,4156.58 USBC1.A6@4019.68,4315.11 ; 4019.72,4277.95 4049.21,4277.95 4059.06,4287.79 USBC1.B6@4059.05,4315.11
  Bottom Layer w19.68: TV1.6@3832.67,4132.95 3940.94,4132.95 v1(3976.38,4168.38)
USB-VCC: C33.1 D4.2 IC2.4 LED12.3 pad.7 SW2.2 TV1.5 USBC1.A4 USBC1.A9 USBC1.B4 USBC1.B9 | length 2425.8
  Top Layer w20: v2(3976.38,4201.85) v2(3976.38,4379.01) ; SW2.2@4791.32,4499.09 4848.42,4556.18 v2(5053.15,4556.18)
  Bottom Layer w7.87: USBC1.A4@3929.13,4315.11 USBC1.B9@3940.94,4315.11 ; 4129.92,4272.72 USBC1.A9@4129.92,4315.1 4129.93,4337.66 4117.89,4349.7 ; 4117.92,4349.68 USBC1.B4@4118.1,4315.1 4118.12,4341.58 4080.72,4378.98 3978.12,4378.98 3929.12,4329.98 USBC1.A4@3929.13,4315.11 3929.12,4337.68 3976.42,4384.88 4082.72,4384.88 4117.92,4349.68
  Bottom Layer w10: C33.1@5184.08,4546.34 5184.09,4526.31 5199.21,4511.19 IC2.4@5199.21,4500.93 ; C33.1@5184.12,4546.38 5184.12,4555.28 5198.82,4569.88 5318.92,4569.88 5340.22,4548.58 LED12.3@5340.23,4537.4
  Bottom Layer w20: TV1.5@3832.67,4170.35 3915.32,4170.38 3946.82,4201.88 v2@3976.42,4201.88 ; 4139.72,4272.68 4202.72,4272.68 4246.02,4315.98 4246.02,4378.98 4293.32,4426.28 4718.52,4426.28 SW2.2@4791.32,4499.09 ; v2(5053.15,4556.18) 5070.61,4538.72 pad.7@5104.33,4538.71 5111.96,4546.34 C33.1@5184.08,4546.34
USBC1_A5: R5.1 USBC1.A5 | length 251.5
  Bottom Layer w10: R5.1@3775.59,4310.79 3809.72,4276.68 3970.52,4276.68 3980.32,4286.48 USBC1.A5@3980.31,4315.11
USBC1_B5: R7.2 USBC1.B5 | length 325.6
  Bottom Layer w10: R7.2@3967.82,4060.12 3996.06,4060.12 4098.43,4162.48 USBC1.B5@4098.42,4315.11
USR: P3.1 U20.55 | length 135.7
  Bottom Layer w10: U20.55@3755.72,3838.11 3811.42,3838.08 3842.52,3869.18 P3.1@3878.54,3869.17
VBAT: BAT2.1 C32.1 D4.1 IC2.3 pad.13 R23.1 | length 3248.2
  Bottom Layer w20: BAT2.1@2198.81,4452.82 2286.98,4540.98 2517.95,4540.98 2581.24,4477.69 R23.1@2797.95,4477.68 ; R23.1@2797.95,4477.68 2831.22,4477.68 2886.62,4422.28 pad.13@3761.14,4422.28 4251.92,4422.28 4380.62,4550.98 4967.92,4550.98 5007.92,4510.98 5007.92,4473.08 D4.1@5104.32,4376.72 5183.1,4376.72 5186.04,4373.77 C32.1@5186.05,4347.48
VBAT_MEAS: R23.2 R35.2 U20.27 | length 1056.2
  Top Layer w10: v1(3145.67,4064.05) 3226.37,4064.05 v1(3246.06,4044.37)
  Bottom Layer w10: R23.2@2797.95,4444.28 2794.65,4440.99 R35.2@2794.65,4400.98 2797.95,4397.69 2797.95,4110.98 2844.88,4064.05 v1(3145.67,4064.05) ; v1(3246.06,4044.37) 3246.06,3882.95 3271.22,3857.79 U20.27@3318.72,3857.8
VBUS: C35.2 C38.1 C39.2 C40.2 C43.2 C46.2 C50.2 C52.2 C53.2 C54.2 C55.2 C56.2 C57.2 C60.1 C61.2 C62.1 C64.2 C67.2 C68.1 C69.2 C83.2 L1.1 LED12.1 P1.1 pad.16 R38.2 R39.2 R48.2 SR3.10 SR3.16 SR4.10 SR4.16 U1.16 U2.3 U2.7 U2.8 U8.8 U8.11 U8.12 U8.20 U8.31 U8.35 U8.41 U8.46 U8.47 U15.3 U15.7 U15.10 U15.11 U20.7 U20.13 U20.19 U20.32 U20.48 U20.64 WAVESHARE2.6 WAVESHARE2.9 WAVESHARE2.10 | length 15563
  Top Layer w20: v2(3066.93,3780.59) v2(3145.67,3701.85) ; v2@3171.22,4087.68 3251.97,4087.68 v2(3295.28,4044.37) ; v2(3379.92,3532.56) v2(3458.66,3532.56) v2(3557.09,3532.56) 3683.08,3532.56 v2(3690.95,3524.69) ; v2(3769.69,3997.13) 3769.69,4001.07 3787.95,4019.32 v2(3787.95,4130.98) ; v2(3927.17,3997.13) 3998.01,3997.13 v2(4007.87,3987.28) ; v2(5251.97,4227.44) 5251.97,4229.42 v2(5332.67,4310.12) ; v2(6318.89,4093.58) 6368.1,4044.37 v2(6372.05,4044.37) ; v2(6952.75,3491.22) v2(6952.75,3945.94)
  Bottom Layer w7.87: U2.3@3240.15,3700.26 U20.19@3318.72,3700.32 ; U20.32@3318.72,3956.22 3318.72,3963.59 3320.82,3965.68 ; U20.13@3448.64,3590.09 3448.65,3542.57 v2(3458.66,3532.56) ; v2(3557.09,3532.56) 3566.76,3542.23 U20.7@3566.76,3590.08 ; U20.48@3684.86,4027.09 3714.81,3997.13 v2(3769.69,3997.13) ; U20.64@3755.72,3660.98 3783.02,3660.98 3809.12,3634.88 3809.12,3594.58 ; R38.2@4029.53,3833.53 4036.12,3826.98 4036.12,3809.28 4045.32,3800.08 4093.82,3800.08 4110.52,3816.78 C69.2@4110.52,3832.18 ; C67.2@4040.57,3913.86 4045.53,3908.91 U15.3@4077.97,3908.91 4089.99,3908.91 4117.33,3881.56 U15.11@4117.34,3869.53 ; C69.2@4110.47,3832.13 4117.33,3839 U15.11@4117.34,3869.53 ; U15.10@4137.02,3869.53 U15.11@4117.34,3869.53 ; U15.7@4137.02,3928.59 4137.03,3961.09 C68.1@4143.88,3967.96 ; C56.2@6002.91,4534.52 6024.56,4556.18 6332.71,4556.18 6348.02,4540.78 U8.41@6348.04,4455.78
  Bottom Layer w10: WAVESHARE2.10@3440.94,4286.49 3441.22,4388.88 ; WAVESHARE2.10@3440.94,4286.49 3442.91,4284.52 3442.91,4223.5 3459.68,4206.73 C39.2@3468.5,4206.74 WAVESHARE2.9@3468.5,4286.49 3468.62,4388.88 ; C38.1@3525.59,4206.74 3551.18,4232.33 WAVESHARE2.6@3551.17,4286.49 3550.42,4388.88 ; C57.2@5929.13,4566.97 5934.12,4571.88 6391.72,4571.88 6427.12,4536.48 U8.46@6427.04,4455.78 ; C54.2@6002.91,4190.04 6050.16,4142.8 U8.20@6348.04,4142.79 ; C55.2@6002.91,4231.38 6007.87,4231.38 6147.77,4371.28 U8.35@6214.68,4371.27 ; 6084.86,4308.37 U8.31@6214.68,4308.27 ; 6427.02,4522.68 6443.02,4522.58 U8.47@6443.04,4455.78 ; U8.12@6529.52,4213.27 6614.12,4213.68 ; U8.11@6529.52,4229.27 6598.42,4229.41 6614.16,4213.66 C53.2@6614.16,4047.29 ; U8.8@6529.52,4276.27 6592.89,4276.28 6655.5,4213.66 C52.2@6655.5,4047.29 ; C62.1@6788.41,3473.5 6788.42,3486.38 6801.22,3499.08 6944.92,3499.08 v2(6952.75,3491.22)
  Bottom Layer w11.81: 2730.32,3788.48 2730.32,3790.48 2757.91,3817.98 2862.22,3817.98 2879.94,3800.26 U2.8@2948.81,3800.26
  Bottom Layer w20: C83.2@2712.59,3489.99 2756.82,3489.98 2796.22,3529.38 U1.16@2796.19,3593.62 ; 2730.32,3788.48 2730.32,3629.01 2765.71,3593.62 U1.16@2796.19,3593.62 ; U2.7@2925.18,3750.47 2948.81,3774.09 U2.8@2948.81,3800.26 ; C61.2@2926.21,3867.2 2926.21,3822.86 U2.8@2948.81,3800.26 ; v2(3145.67,3701.85) 3147.26,3700.26 U2.3@3240.15,3700.26 ; v2@3171.22,4087.68 2864.12,4087.68 2828.72,4123.08 2828.72,4339.68 2879.86,4390.83 3675.17,4390.83 3714.52,4351.48 3714.52,4276.7 3787.95,4203.27 v2(3787.95,4130.98) ; v2(3171.26,4087.68) 3171.26,3884.92 v2(3066.93,3780.59) 3047.24,3800.27 U2.8@2948.81,3800.26 ; v2(3295.28,4044.37) 3316.92,4044.37 C35.2@3316.93,4088.69 3316.92,3965.68 3320.82,3965.68 ; v2(3379.92,3532.56) 2801.02,3532.58 2796.22,3537.38 U1.16@2796.19,3593.62 ; C64.2@3438.97,3512.87 v2(3458.66,3532.56) ; C43.2@3557.08,3503.98 v2(3557.09,3532.56) ; v2(3690.95,3524.69) 3760.84,3594.58 C46.2@3832.67,3594.6 ; v2(3769.69,3997.13) 3882.85,3997.13 C40.2@3885.82,4000.11 ; C40.2@3885.82,4000.11 3924.19,4000.11 v2(3927.17,3997.13) ; P1.1@3926.57,3739.25 4020.85,3833.53 R38.2@4029.53,3833.53 ; C67.2@4040.57,3913.86 3984.62,3913.86 R39.2@3982.28,3916.2 3982.28,3961.69 v2(4007.87,3987.28) 4275.59,4255 4492.14,4255 ; 4078.23,4053.7 4143.89,3988.05 C68.1@4143.88,3967.96 ; R48.2@4551.18,4238.23 4524.58,4238.23 C50.2@4509.84,4223.51 4509.85,4237.3 4492.14,4255 ; v2(5251.97,4227.44) 5007.87,4227.44 4980.31,4255 4492.14,4255 ; v2(5332.67,4310.12) 5432.8,4410.25 5432.8,4537.4 ; LED12.1@5380.23,4537.4 5861.14,4537.4 pad.16@5876.58,4552.84 5890.71,4566.98 C57.2@5929.13,4566.97 5987.38,4566.98 6002.91,4551.44 C56.2@6002.91,4534.52 ; 5432.82,4418.08 5695.22,4418.08 6019.72,4093.58 v2(6318.89,4093.58) ; 5972.75,4140.55 6002.91,4170.71 C54.2@6002.91,4190.04 C55.2@6002.91,4231.38 ; v2(6372.05,4044.37) 6523.62,4044.38 6586.62,3981.38 6730.32,3981.38 6787.42,3924.28 C60.1@6790.38,3924.29 ; 6551.8,4016.2 6582.89,4047.29 C53.2@6614.16,4047.29 C52.2@6655.5,4047.29 6723.45,4047.29 L1.1@6726.37,4044.37 ; 6754.44,3957.26 6974.9,3957.26 7058.06,3874.09 SR3.10@7118.96,3874.09 ; 6948.06,3957.26 6948.06,3950.63 v2(6952.75,3945.94) ; v2(6952.75,3491.22) 7022.62,3421.34 SR4.10@7118.96,3421.34 7179.13,3421.34 ; SR4.16@7118.96,3121.34 7141.93,3121.34 7179.13,3158.54 7179.13,3532.56 7137.59,3574.09 SR3.16@7118.96,3574.09
WAVESHARE2_26: R3.2 WAVESHARE2.26 | length 115.7
  Bottom Layer w10: WAVESHARE2.26@3000,4286.49 3000,4225.47 3032.17,4193.31 R3.2@3032.17,4184.13
pads on no net: AUDIO2. BAT2.4 BAT2.5 IC2.5 LED3.3 RN3.2 RN3.7 RN5.3 RN5.6 SR3.9 SW2.3 TV1.1 TV1.3 U1.8 U1.9 U1.10 U1.11 U8.3 U8.7 U8.24 U8.26 U8.27 U8.28 U8.29 U8.30 U8.32 U8.33 U8.42 U15.5 U20.1 U20.8 U20.9 U20.10 U20.25 U20.26 U20.30 U20.33 U20.37 U20.38 U20.39 U20.40 U20.41 U20.42 U20.43 U20.46 U20.49 U20.50 U20.52 U20.53 U20.54 U20.56 UC1.12 UC1.13 UC1.28 UC1.30 UC2.26 UC2.27 UC2.28 UC2.30 UC2.31 UC3.28 USBC1. USBC1.A8 USBC1.B8 WAVESHARE2.7 WAVESHARE2.20

## Polygon pours and split planes (outlines as drawn)
GNDA on Top Layer (solid): 6470.47,4605.39 6470.47,4290.43 6598.42,4290.43 6669.28,4217.6 6669.28,4089.64 6789.36,4091.61 6789.36,4030.59 7198.81,4034.53 7494.09,4034.53 7494.09,4605.39
GND on Top Layer (solid): 4227.95,4680.98 4227.95,3620.98 4147.95,3540.98 4017.95,3540.98 3937.95,3460.98 3677.95,3200.98 3477.95,3200.98 3437.95,3240.98 2737.95,3240.98 2567.95,3070.98 2477.95,2980.98 2327.95,2980.98 2317.95,2990.98 2317.95,3100.98 2337.95,3120.98 2427.95,3120.98 2447.95,3140.98 2447.95,3150.98 2567.95,3270.98 2567.95,3410.98 2647.95,3490.98 2647.95,4000.98 2667.95,4020.98 2667.95,4330.98 2717.95,4380.98 2717.95,4610.98 2777.95,4670.98 2787.95,4670.98
GND on Top Layer (solid): 7437.95,3080.98 6877.95,3080.98 6877.95,3070.98 6797.95,2990.98 6637.95,2990.98 6467.95,3160.98 6467.95,3310.98 6487.95,3310.98 6647.95,3510.98 6647.95,3610.98 6647.95,3680.98 6467.95,3920.98 6007.95,3920.98 5997.95,3930.98 5907.95,4040.98 5707.95,4280.98 5427.95,4280.98 5407.95,4300.98 5387.95,4300.98 5237.95,4150.98 4967.95,4150.98 4887.95,4210.98 4787.95,4240.98 4617.95,4240.98 4217.95,3840.98 4217.95,4620.98 4197.95,4640.98 6377.95,4640.98 6427.95,4690.98 7567.95,4690.98

## Keep-outs
Keep-Out Layer:
  circle w7.87 net S$148723: c4271.65,4115.24 r43.31
  circle w7.87 net S$148723: c2306.22,3758.1 r43.31
  circle w7.87 net S$148723: c4527.95,3410.98 r43.31
  circle w7.87 net S$148723: c4049.2,3315.82 r43.31
  circle w7.87 net S$148723: c3097.95,3310.98 r43.31
  lines w10: 2474.4,4241.23 ccw(c2592.51,4241.23) 2710.62,4241.23 ccw(c2592.51,4241.23) 2474.4,4241.23 ; 2689.84,2330.99 cw(c2807.95,2330.99) 2926.07,2330.99 cw(c2807.95,2330.99) 2689.84,2330.99 ; 5019.84,2490.99 cw(c5137.95,2490.99) 5256.06,2490.99 cw(c5137.95,2490.99) 5019.84,2490.99 ; 5789.84,3800.99 cw(c5907.95,3800.99) 6026.06,3800.99 cw(c5907.95,3800.99) 5789.84,3800.99 ; 6499.84,2080.99 cw(c6617.95,2080.99) 6736.06,2080.99 cw(c6617.95,2080.99) 6499.84,2080.99

## Silkscreen, mask and mechanical layers (free items; w line width, h text height)
Top Overlay:
  circle w7.87: c6982.28,2325.87 r236.22
  circle w7.87: c7029.52,2845.55 r236.22
  circle w7.87: c6321.81,2821.95 r314.96
  circle w7.87: c6321.76,3609.33 r314.96
  circle w7.87: c5534.4,4003.05 r314.96
  circle w7.87: c5534.4,3215.64 r314.96
  circle w7.87: c4746.96,3924.29 r314.96
  circle w7.87: c4746.96,3136.89 r314.96
  circle w7.87: c5534.4,2428.24 r314.96
  circle w7.87: c4746.96,2349.49 r314.96
  circle w7.87: c3664.29,2487.28 r236.22
  circle w7.87: c3113.11,2487.28 r236.22
  circle w7.87: c3861.14,2920.35 r236.22
  circle w7.87: c3388.7,2920.35 r236.22
  circle w7.87: c2424.13,2310.12 r314.96
  circle w7.87: c2916.26,2920.35 r236.22
  lines w7.99: 3529.52,4453.82 3529.52,4544.37
  lines w7.99 net S$2850: 2860.23,4201.85 2860.23,3776.66 3718.5,3776.66 3718.5,4201.85 2864.16,4201.85
  lines w7.99 net S$2853: 3053.14,4453.82 3053.14,4544.37 ; 2757.86,3690.04 2757.86,4453.82 3816.92,4453.82 3816.92,3690.04 2757.86,3690.04
  lines w10: 1636.22,2498.1 1956.22,2498.1 1956.22,4418.1 1636.22,4418.1 1636.22,2498.1 ; 3856.22,4368.1 4206.22,4368.1 4206.22,4598.1 3856.22,4598.1 3856.22,4368.1 ; 4616.22,4408.1 4966.22,4408.1 4966.22,4588.1 4616.22,4588.1 4616.22,4408.1 ; 7056.22,4118.1 7296.22,4118.1 7296.22,4598.1 7056.22,4598.1 7056.22,4118.1 ; 7086.22,4588.1 7266.22,4588.1 7266.22,4688.1 7086.22,4688.1 7086.22,4588.1
  lines w15.75 net S$141146: 2658.03,2018.57 2661.9,2014.7 4441.11,2014.7
  text "Pocket organ / Thomas TEMPE / 2020-05-10" at 3220.47,3447.91 h118.11
  text "V17" at 2520.14,3122.4 h275.59 r10
Bottom Overlay:
  circle w10: c2592.52,4241.22 r157.48
  circle w10: c2807.95,2330.98 r157.48
  circle w10: c5907.95,3800.98 r157.48
  circle w10: c6617.95,2080.98 r157.48
  circle w10: c5137.95,2490.98 r157.48
  lines w7.87 net S$146126: 6425.19,4516.81 6444.88,4516.81
  lines w7.87 net S$148393: 6425.19,4516.81 6425.19,4530.98 6444.87,4530.98 6444.87,4516.81
  lines w7.87 net S$148395: 6458.65,4516.81 6458.65,4530.59
  lines w7.87 net S$148397: 6411.41,4516.81 6411.41,4530.59
  lines w7.87 net S$148399: 6348.42,4514.84 6348.42,4530.59
  lines w7.87 net S$148401: 6332.67,4514.84 6332.67,4530.59
  lines w7.87 net S$148403: 6318.89,4514.84 6318.89,4530.59
  lines w7.87 net S$148405: 6301.17,4514.84 6301.17,4530.59
  lines w7.87 net S$148407: 6285.43,4514.84 6285.43,4530.59
  lines w7.87 net S$148409: 6139.76,4386.89 6151.57,4386.89
  lines w7.87 net S$148411: 6139.76,4371.14 6151.57,4371.14
  lines w7.87 net S$148413: 6139.76,4353.42 6151.57,4353.42
  lines w7.87 net S$148415: 6139.76,4308.15 6151.57,4308.15
  lines w7.87 net S$148417: 6139.76,4213.66 6151.57,4213.66
  lines w7.87 net S$148421: 6379.91,4071.93 6379.91,4083.74
  lines w7.87 net S$148423: 6348.42,4071.93 6348.42,4083.74
  lines w7.87 net S$148425: 6427.16,4070.98 6427.16,4083.74 6457.95,4083.74 6457.95,4070.98 6427.16,4070.98
  lines w7.87 net S$148427: 6592.51,4213.66 6592.51,4229.41 6608.26,4229.41 6608.26,4213.66 6592.51,4213.66
  lines w7.87 net S$148429: 6592.51,4243.19 6592.51,4260.9 6608.26,4260.9 6608.26,4243.19 6594.48,4243.19
  lines w7.87 net S$148431: 6592.51,4276.65 6608.26,4276.65
  lines w7.87 net S$148433: 6592.51,4308.15 6608.26,4308.15
  lines w7.87 net S$148435: 6592.51,4325.86 6608.26,4325.86
  lines w7.87 net S$148437: 6592.51,4339.64 6610.23,4339.64
  lines w7.87 net S$148441: 6592.51,4386.89 6608.26,4386.89
  lines w7.87 net S$148445: 6592.51,4371.14 6608.26,4371.14
  lines w7.87 net S$148447: 6411.41,4071.93 6411.41,4083.74
  lines w10: 2363.07,4766.02 4252.83,4766.02 4252.83,5395.94 2363.07,5395.94 2363.07,4766.02
  text "3.7V Li-Po. 100mA charge." at 1991.56,4531.39 h47.24 r91
  text "Warning: check / polarity before / replacing battery" at 1721.57,4390.98 h47.24 r90
  text "+  -" at 2233.48,4182.36 h39.37 r352